# EAGLE board Filters_3Stage_Circuit_Manual (EAGLE 9.3.0)
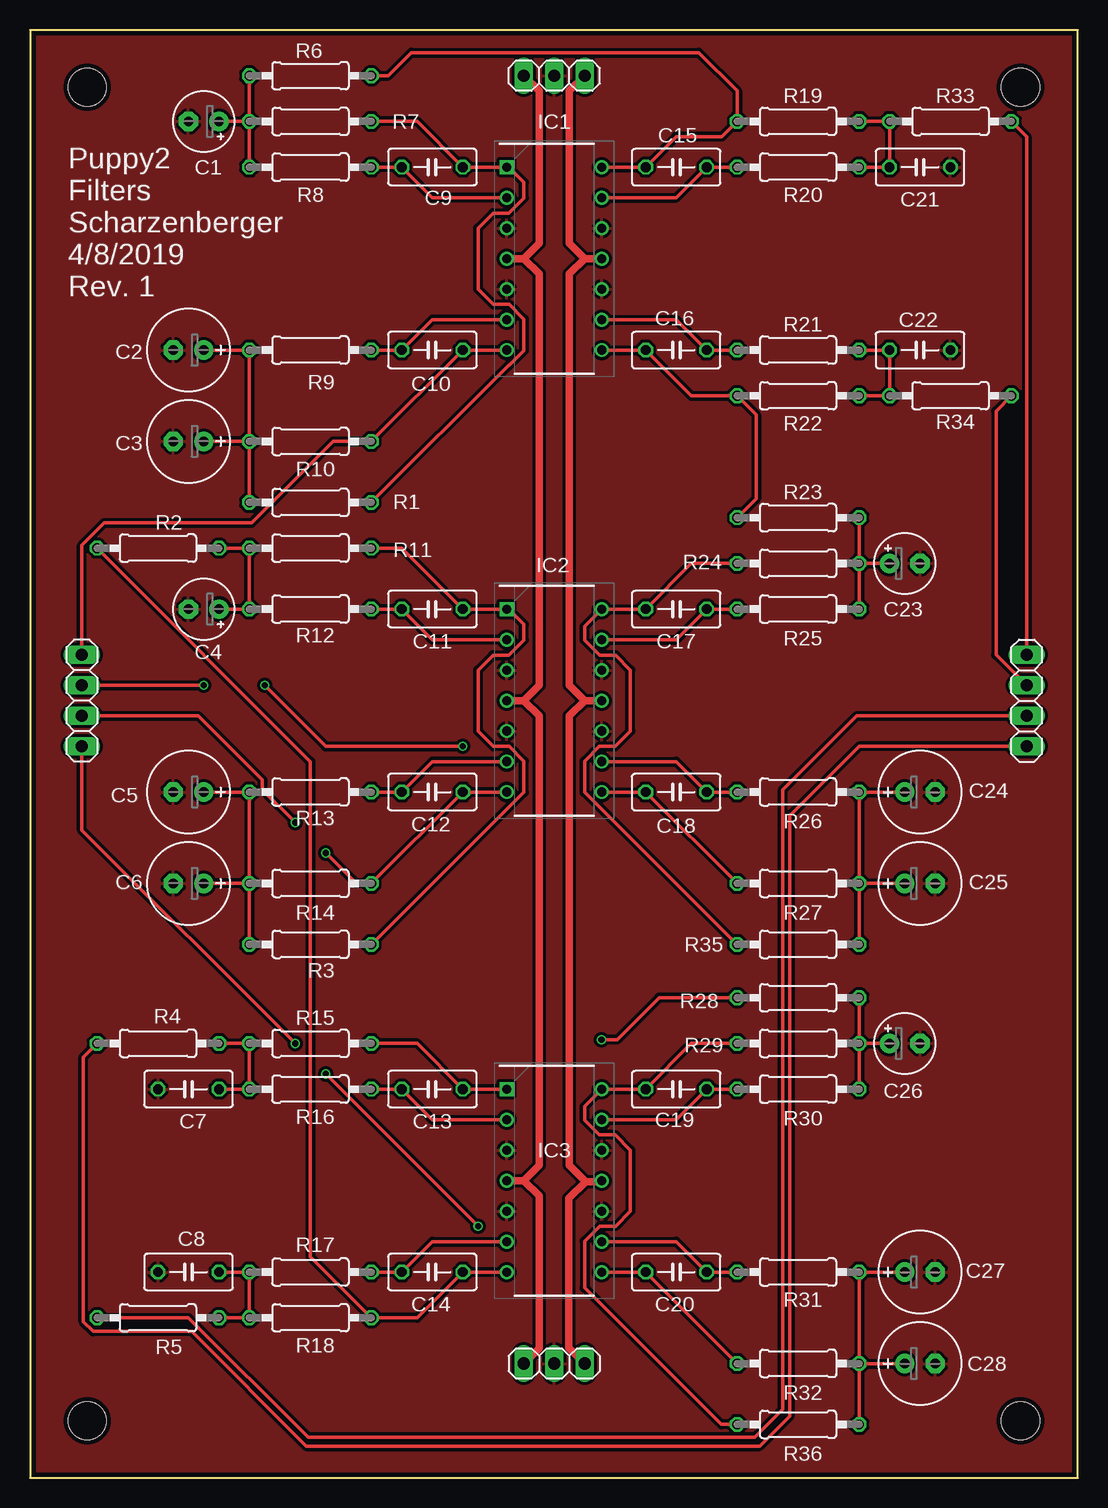
[diagram p0: board, top side]
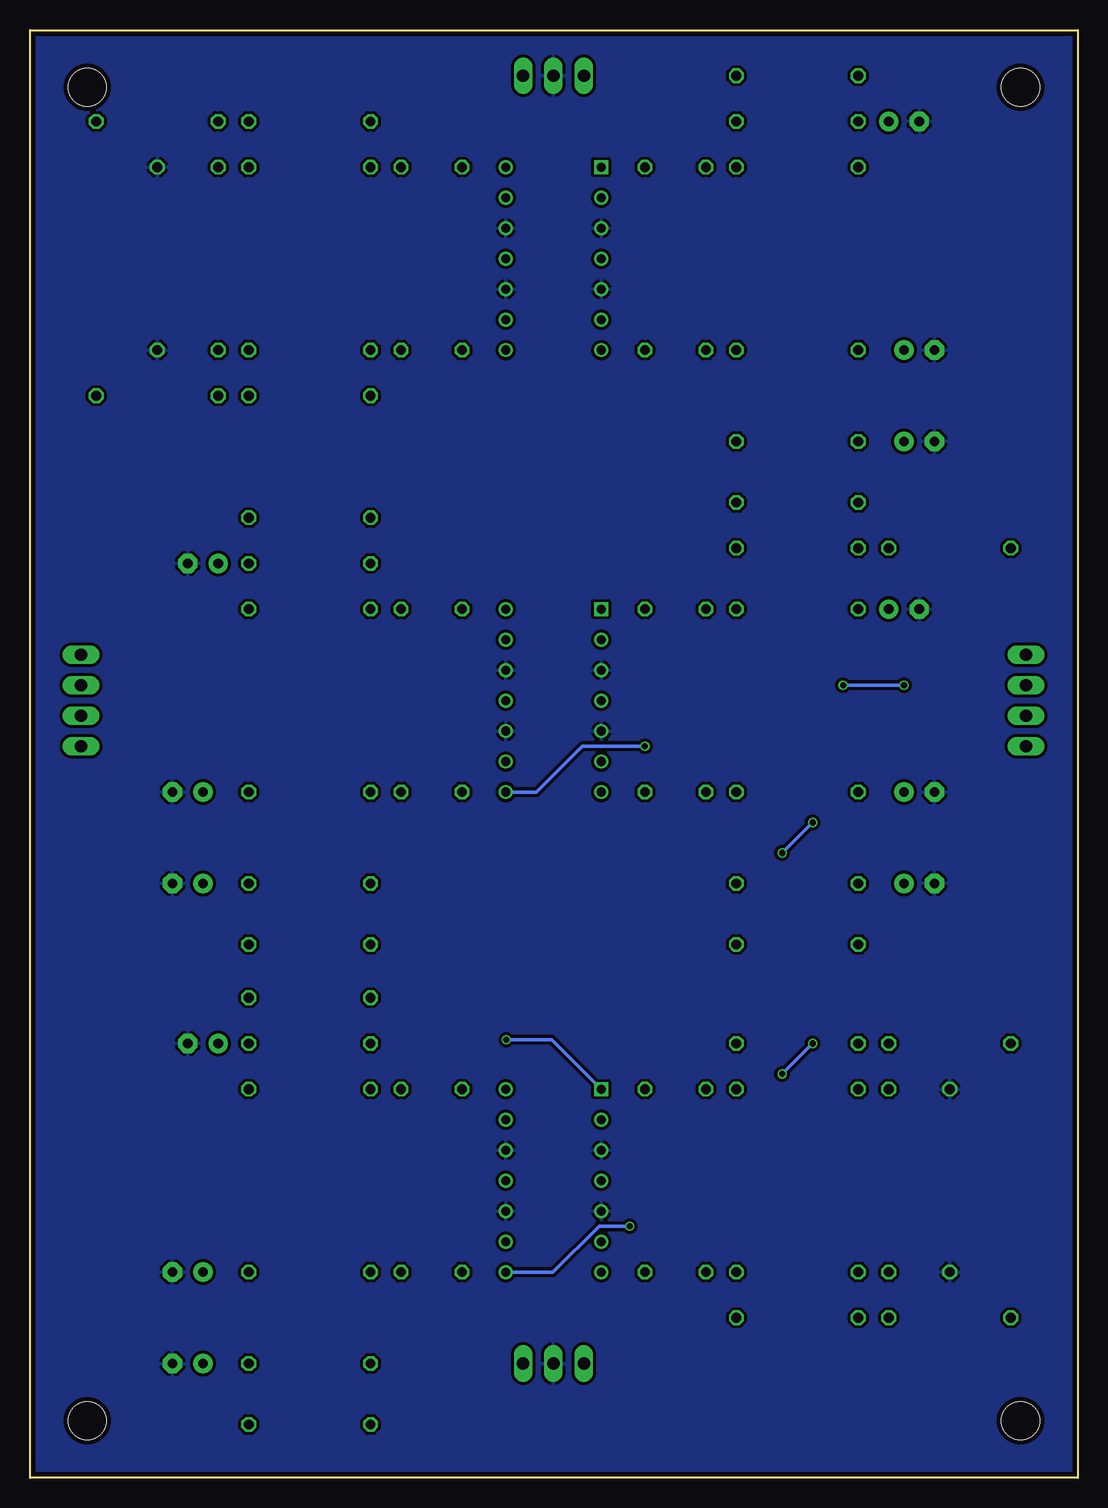
[diagram p1: board, bottom side, seen from below]

Size 87.31 x 120.65 mm. Coordinates in mm from the lower left corner, seen from the top.
Outline: 0,0 87.31,0 87.31,120.65 0,120.65 0,0
Copper layers (1*16): Top 0.035559375mm / dielectric 1.6mm / Bottom 0.035559375mm
Design rules "oshpark-2layer": minimum track width 6mil, minimum drill 10mil, track to track 6mil, track to pad 6mil, pad to pad 6mil, via to via 6mil, smd to smd 6mil, copper to edge 15mil, drill to drill 6mil, minimum pad ring 5mil, minimum via ring 5mil, stop-mask expansion 2.5mil, vias tented up to drill 0mil, thermal gap 10mil
Net classes: 0 default: width 0.305 mm, drill 0.508 mm, clearance 0.254 mm
Holes 3.17 mm at 4.76,115.89 82.55,115.89 4.76,4.76 82.55,4.76

## Footprints (pad centres in the part's own frame; a part is rotated, then mirrored left to right if it is on the bottom)
E2,5-5 = drill 0.813 pad 1.6: + -1.27,0 | drill 0.813 pad 1.6 octagon: - 1.27,0
E2,5-7 = drill 0.813 pad 1.6: + -1.27,0 | drill 0.813 pad 1.6 octagon: - 1.27,0
C050-030X075 = drill 0.813 octagon: 1 -2.54,0; 2 2.54,0
DIP794W56P254L1905H533Q14N = drill 0.759 pad 1.159 square: 1 -3.969,7.62 | drill 0.759 pad 1.159: 2 -3.969,5.08; 3 -3.969,2.54; 4 -3.969,0; 5 -3.969,-2.54; 6 -3.969,-5.08; 7 -3.969,-7.62; 8 3.969,-7.62; 9 3.969,-5.08; 10 3.969,-2.54; 11 3.969,0; 12 3.969,2.54; 13 3.969,5.08; 14 3.969,7.62
1X04 = drill 1.016 long: 1 -3.81,0; 2 -1.27,0; 3 1.27,0; 4 3.81,0
1X03 = drill 1.016 long: 1 -2.54,0; 2 0,0; 3 2.54,0
0207/10 = drill 0.813 octagon: 1 -5.08,0; 2 5.08,0

## Placement (x,y rotation side)
C1  2.2e-6  [E2,5-5]  14.48,113.03 180 top
C2  10e-6  [E2,5-7]  13.21,93.98 180 top
C3  10e-6  [E2,5-7]  13.21,86.36 180 top
C4  2.2e-6  [E2,5-5]  14.48,72.39 180 top
C5  10e-6  [E2,5-7]  13.21,57.15 180 top
C6  10e-6  [E2,5-7]  13.21,49.53 180 top
C7  0.22e-6  [C050-030X075]  13.21,32.38 180 top
C8  0.22e-6  [C050-030X075]  13.21,17.14 180 top
C9  0.1e-6  [C050-030X075]  33.53,109.22 180 top
C10  0.1e-6  [C050-030X075]  33.53,93.98 180 top
C11  0.1e-6  [C050-030X075]  33.53,72.39 180 top
C12  0.1e-6  [C050-030X075]  33.53,57.15 180 top
C13  0.1e-6  [C050-030X075]  33.53,32.38 180 top
C14  0.1e-6  [C050-030X075]  33.53,17.14 180 top
C15  0.1e-6  [C050-030X075]  53.85,109.22 0 top
C16  0.1e-6  [C050-030X075]  53.85,93.98 0 top
C17  0.1e-6  [C050-030X075]  53.85,72.39 0 top
C18  0.1e-6  [C050-030X075]  53.85,57.15 0 top
C19  0.1e-6  [C050-030X075]  53.85,32.38 0 top
C20  0.1e-6  [C050-030X075]  53.85,17.14 0 top
C21  0.22e-6  [C050-030X075]  74.17,109.22 0 top
C22  0.22e-6  [C050-030X075]  74.17,93.98 0 top
C23  2.2e-6  [E2,5-5]  72.9,76.2 0 top
C24  10e-6  [E2,5-7]  74.17,57.15 0 top
C25  10e-6  [E2,5-7]  74.17,49.53 0 top
C26  2.2e-6  [E2,5-5]  72.9,36.2 0 top
C27  10e-6  [E2,5-7]  74.17,17.14 0 top
C28  10e-6  [E2,5-7]  74.17,9.53 0 top
IC1  LM324N  [DIP794W56P254L1905H533Q14N]  43.69,101.6 0 top
IC2  LM324N  [DIP794W56P254L1905H533Q14N]  43.69,64.77 0 top
IC3  LM324N  [DIP794W56P254L1905H533Q14N]  43.69,24.77 0 top
JP1  [1X04]  4.32,64.77 270 top
JP2  [1X03]  43.69,116.84 180 top
JP3  [1X03]  43.69,9.53 0 top
JP4  [1X04]  83.06,64.77 90 top
R1  1.8e3  [0207/10]  23.37,81.28 180 top
R2  6.8e3  [0207/10]  10.67,77.47 180 top
R3  1.8e3  [0207/10]  23.37,44.45 180 top
R4  27e3  [0207/10]  10.67,36.2 180 top
R5  27e3  [0207/10]  10.67,13.34 180 top
R6  6.8e3  [0207/10]  23.37,116.84 180 top
R7  6.8e3  [0207/10]  23.37,113.03 180 top
R8  2.7e3  [0207/10]  23.37,109.22 180 top
R9  820  [0207/10]  23.37,93.98 180 top
R10  1.8e3  [0207/10]  23.37,86.36 180 top
R11  6.8e3  [0207/10]  23.37,77.47 180 top
R12  2.7e3  [0207/10]  23.37,72.39 180 top
R13  820  [0207/10]  23.37,57.15 180 top
R14  1.8e3  [0207/10]  23.37,49.53 180 top
R15  15e3  [0207/10]  23.37,36.2 180 top
R16  27e3  [0207/10]  23.37,32.38 180 top
R17  27e3  [0207/10]  23.37,17.14 180 top
R18  15e3  [0207/10]  23.37,13.34 180 top
R19  15e3  [0207/10]  64.01,113.03 180 top
R20  27e3  [0207/10]  64.01,109.22 180 top
R21  27e3  [0207/10]  64.01,93.98 180 top
R22  15e3  [0207/10]  64.01,90.17 180 top
R23  6.8e3  [0207/10]  64.01,80.01 180 top
R24  6.8e3  [0207/10]  64.01,76.2 180 top
R25  2.7e3  [0207/10]  64.01,72.39 180 top
R26  820  [0207/10]  64.01,57.15 180 top
R27  1.8e3  [0207/10]  64.01,49.53 180 top
R28  6.8e3  [0207/10]  64.01,40.01 180 top
R29  6.8e3  [0207/10]  64.01,36.2 180 top
R30  2.7e3  [0207/10]  64.01,32.38 180 top
R31  820  [0207/10]  64.01,17.14 180 top
R32  1.8e3  [0207/10]  64.01,9.53 180 top
R33  27e3  [0207/10]  76.71,113.03 180 top
R34  27e3  [0207/10]  76.71,90.17 180 top
R35  1.8e3  [0207/10]  64.01,44.45 180 top
R36  1.8e3  [0207/10]  64.01,4.45 180 top

## Library data of the parts
C1-C6 C23-C28 = rcl; SPICEPREFIX: C
C7-C22 = adafruit
IC1-IC3 = SamacSys_Parts; DESCRIPTION: OP Amp Quad GP 16V/32V 14-Pin PDIP Texas Instruments LM324N, Quad Op Amp, 1.2MHz, 5 28 V, 14-Pin PDIP; HEIGHT: 5.334mm; MANUFACTURER_NAME: Texas Instruments; MANUFACTURER_PART_NUMBER: LM324N; MOUSER_PART_NUMBER: 595-LM324N
JP1-JP4 = pinhead
R1-R36 = rcl; SPICEPREFIX: R

## Nets
+24V: IC1.4 IC2.4 IC3.4 JP2.3 JP3.1
-24V: IC1.11 IC2.11 IC3.11 JP2.1 JP3.3
GND: C1.- C2.- C3.- C4.- C5.- C6.- C7.2 C8.2 C21.2 C22.2 C23.- C24.- C25.- C26.- C27.- C28.- IC1.3 IC1.5 IC1.10 IC1.12 IC2.3 IC2.5 IC2.10 IC2.12 IC3.3 IC3.5 IC3.10 IC3.12 JP2.2 JP3.2
IN0: JP4.4 R33.1
IN1: JP4.3 R34.1
IN2: JP4.2 R5.2
IN3: JP4.1 R4.2
N$216: C15.1 IC1.14 R6.1 R19.2
N$217: C15.2 IC1.13 R20.2
N$218: C21.1 R19.1 R20.1 R33.2
N$219: C9.1 IC1.1 R1.1 R7.1
N$221: C9.2 IC1.2 R8.1
N$223: C10.2 IC1.6 R9.1
N$224: C1.+ R6.2 R7.2 R8.2
N$225: C2.+ C3.+ R1.2 R9.2 R10.2
N$226: C16.1 IC1.8 R22.2 R23.2
N$227: C16.2 IC1.9 R21.2
N$228: C22.1 R21.1 R22.1 R34.2
N$229: C17.1 IC2.14 R24.2 R35.2
N$230: C17.2 IC2.13 R25.2
N$231: C23.+ R23.1 R24.1 R25.1
N$234: C11.1 IC2.1 R3.1 R11.1
N$235: C11.2 IC2.2 R12.1
N$236: C4.+ R2.1 R11.2 R12.2
N$238: C12.2 IC2.6 R13.1
N$239: C5.+ C6.+ R3.2 R13.2 R14.2
N$240: C18.2 IC2.9 R26.2
N$241: C24.+ C25.+ R26.1 R27.1 R35.1
N$243: C13.2 IC3.2 R16.1
N$244: C14.1 IC3.7 R2.2 R18.1
N$245: C14.2 IC3.6 R17.1
N$246: C7.1 R4.1 R15.2 R16.2
N$249: C8.1 R5.1 R17.2 R18.2
N$250: C13.1 IC3.1 R15.1 R28.2
N$251: C19.1 IC3.14 R29.2 R36.2
N$252: C19.2 IC3.13 R30.2
N$253: C26.+ R28.1 R29.1 R30.1
N$255: C20.2 IC3.9 R31.2
N$256: C27.+ C28.+ R31.1 R32.1 R36.1
O0: C10.1 IC1.7 JP1.1 R10.1
O1: C18.1 IC2.8 JP1.2 R27.2
O2: C12.1 IC2.7 JP1.3 R14.1
O3: C20.1 IC3.8 JP1.4 R32.2

## Tracks (layer width: path | path; a pad name or v marks a point on that pad's centre or on a via)
+24V
  Top 0.61: JP3.1 42.42,10.79 42.42,23.5 41.15,24.77 | JP2.3 42.42,115.57 42.42,102.87 41.15,101.6 | IC1.4 41.15,101.6 | 41.15,101.6 42.42,100.33 42.42,66.04 41.15,64.77 | IC2.4 41.15,64.77 | 41.15,64.77 42.42,63.5 42.42,26.04 41.15,24.77 | IC3.4 41.15,24.77
-24V
  Top 0.305: 47.58,24.69 IC3.11
  Top 0.61: JP3.3 44.91,10.85 44.91,23.29 46.31,24.69 | JP2.1 44.96,115.57 44.96,102.87 46.23,101.6 | IC1.11 46.23,101.6 | 46.23,101.6 44.96,100.33 44.96,66.04 46.23,64.77 | IC2.11 46.23,64.77 | 46.23,64.77 44.96,63.5 44.96,26.04 46.31,24.69 | 46.31,24.69 47.58,24.69
GND
  pour Top: -1.27,122.24 -1.27,-1.27 88.9,-1.27 88.9,122.24
  pour Bottom: -1.27,122.24 -1.27,-1.27 88.9,-1.27 88.9,122.24
IN0
  Top 0.305: R33.1 83.06,111.76 JP4.4
IN1
  Top 0.305: R34.1 80.52,88.9 80.52,68.58 JP4.3
IN2
  Top 0.305: R5.2 13.21,13.34 23.18,3.37 60.39,3.37 62.74,5.71 62.74,57.34 68.9,63.5 JP4.2
IN3
  Top 0.305: JP4.1 69.09,60.96 63.31,55.18 63.31,5.14 60.8,2.63 23.02,2.63 13.46,12.19 5.27,12.19 4.45,13.02 4.45,35.05 R4.2
N$216
  Top 0.305: IC1.14 C15.1 53.85,111.76 57.66,111.76 R19.2 58.93,115.57 55.73,118.77 31.77,118.77 29.84,116.84 R6.1
N$217
  Top 0.305: IC1.13 53.85,106.68 C15.2 R20.2
N$218
  Top 0.305: R19.1 R33.2 C21.1 R20.1
N$219
  Top 0.305: R7.1 32.26,113.03 C9.1 IC1.1 39.88,109.22 41.15,107.95 41.15,106.64 39.9,105.39 38.58,105.39 37.34,104.14 37.34,99.06 38.61,97.79 39.92,97.79 41.15,96.56 41.15,93.94 39.92,92.71 39.88,92.71 R1.1
N$221
  Top 0.305: IC1.2 33.53,106.68 C9.2 R8.1
N$223
  Top 0.305: IC1.6 33.53,96.52 C10.2 R9.1
N$224
  Top 0.305: R6.2 R7.2 | R7.2 R8.2 | C1.+ R7.2
N$225
  Top 0.305: C2.+ R9.2 R10.2 | R10.2 C3.+ | R10.2 R1.2
N$226
  Top 0.305: IC1.8 C16.1 55.12,90.17 R22.2 60.52,88.58 60.52,81.6 R23.2
N$227
  Top 0.305: IC1.9 53.85,96.52 C16.2 R21.2
N$228
  Top 0.305: R21.1 C22.1 R34.2 R22.1
N$229
  Top 0.305: R24.2 55.12,76.2 C17.1 IC2.14 46.23,70.96 46.23,69.81 47.48,68.56 48.79,68.56 50.04,67.31 50.04,62.23 48.77,60.96 47.46,60.96 46.23,59.73 46.23,57.11 58.89,44.45 R35.2
N$230
  Top 0.305: IC2.13 53.85,69.85 C17.2 R25.2
N$231
  Top 0.305: R23.1 R24.1 | R24.1 R25.1 | R24.1 C23.+
N$234
  Top 0.305: R11.1 30.99,77.47 C11.1 IC2.1 39.88,72.39 41.15,71.12 41.15,69.81 39.9,68.56 38.58,68.56 37.34,67.31 37.34,62.23 38.61,60.96 39.92,60.96 41.15,59.73 41.15,57.11 28.49,44.45 R3.1
N$235
  Top 0.305: IC2.2 33.53,69.85 C11.2 R12.1
N$236
  Top 0.305: C4.+ R12.2 R11.2 R2.1
N$238
  Top 0.305: IC2.6 33.53,59.69 C12.2 R13.1
N$239
  Top 0.305: C5.+ R13.2 R14.2 | R14.2 C6.+ | R14.2 R3.2
N$240
  Top 0.305: IC2.9 53.85,59.69 C18.2 R26.2
N$241
  Top 0.305: R27.1 C25.+ | R35.1 R27.1 | C24.+ R26.1 R27.1
N$243
  Top 0.305: R16.1 C13.2 33.53,29.84 IC3.2
N$244
  Top 0.305: IC3.7 C14.1 32.26,13.34 R18.1 23.37,18.41 23.37,59.69 R2.2
N$245
  Top 0.305: R17.1 C14.2 33.53,19.68 IC3.6
N$246
  Top 0.305: R4.1 R15.2 R16.2 C7.1
N$249
  Top 0.305: C8.1 R17.2 R18.2 R5.1
N$250  (via drill 0.51)
  Top 0.305: IC3.1 C13.1 32.26,36.2 R15.1 | R28.2 52.42,40.01 48.93,36.51 v47.62,36.51
  Bottom 0.305: IC3.1 43.85,36.51 v47.62,36.51
N$251
  Top 0.305: R29.2 55.12,36.2 C19.1 IC3.14 46.23,30.96 46.23,29.8 47.46,28.57 48.77,28.57 50.04,27.3 50.04,22.23 48.79,20.98 47.48,20.98 46.23,19.73 46.23,15.83 57.62,4.45 R36.2
N$252
  Top 0.305: IC3.13 53.85,29.84 C19.2 R30.2
N$253
  Top 0.305: R28.1 R29.1 | R29.1 C26.+ | R29.1 R30.1
N$255
  Top 0.305: IC3.9 53.85,19.68 C20.2 R31.2
N$256
  Top 0.305: R32.1 C28.+ | C27.+ R31.1 R32.1 | R32.1 R36.1
O0
  Top 0.305: IC1.7 C10.1 R10.1 25.26,86.36 18.48,79.58 6.19,79.58 4.32,77.71 JP1.1
O1  (via drill 0.51)
  Top 0.305: IC2.8 C18.1 R27.2 | JP1.2 v14.48,66.04 | v36.07,60.96 24.64,60.96 v19.56,66.04
  Bottom 0.305: v14.48,66.04 v19.56,66.04 | v36.07,60.96 41.31,60.96 45.12,57.15 IC2.8
O2  (via drill 0.51)
  Top 0.305: IC2.7 C12.1 R14.1 27.18,49.53 v24.64,52.07 | JP1.3 14.02,63.5 19.36,58.16 19.36,57.35 v22.1,54.61
  Bottom 0.305: v22.1,54.61 v24.64,52.07
O3  (via drill 0.51)
  Top 0.305: IC3.8 C20.1 R32.2 | v22.1,36.2 4.32,53.98 JP1.4 | v24.64,33.66 v37.34,20.95
  Bottom 0.305: IC3.8 43.73,17.14 39.9,20.98 39.87,20.95 v37.34,20.95 | v22.1,36.2 v24.64,33.66

## Text on the board
tPlace: Puppy2 / Filters / Scharzenberger / 4/8/2019 / Rev. 1